# Altium PCB Copy of WoodStoveLayout2.PcbDoc (part 3 of 4)
Units mil, origin at the board's own origin, x right, y up, seen from the top; angles counter-clockwise.
Board outline 4000 x 3000 mil, 4 copper layers (Top Layer, L2, L3, Bottom Layer), stack 64.6 mil thick; 132 components, 92 nets, 551 pads, 53 vias.
Unrouted connection lines stored in the file: 211.
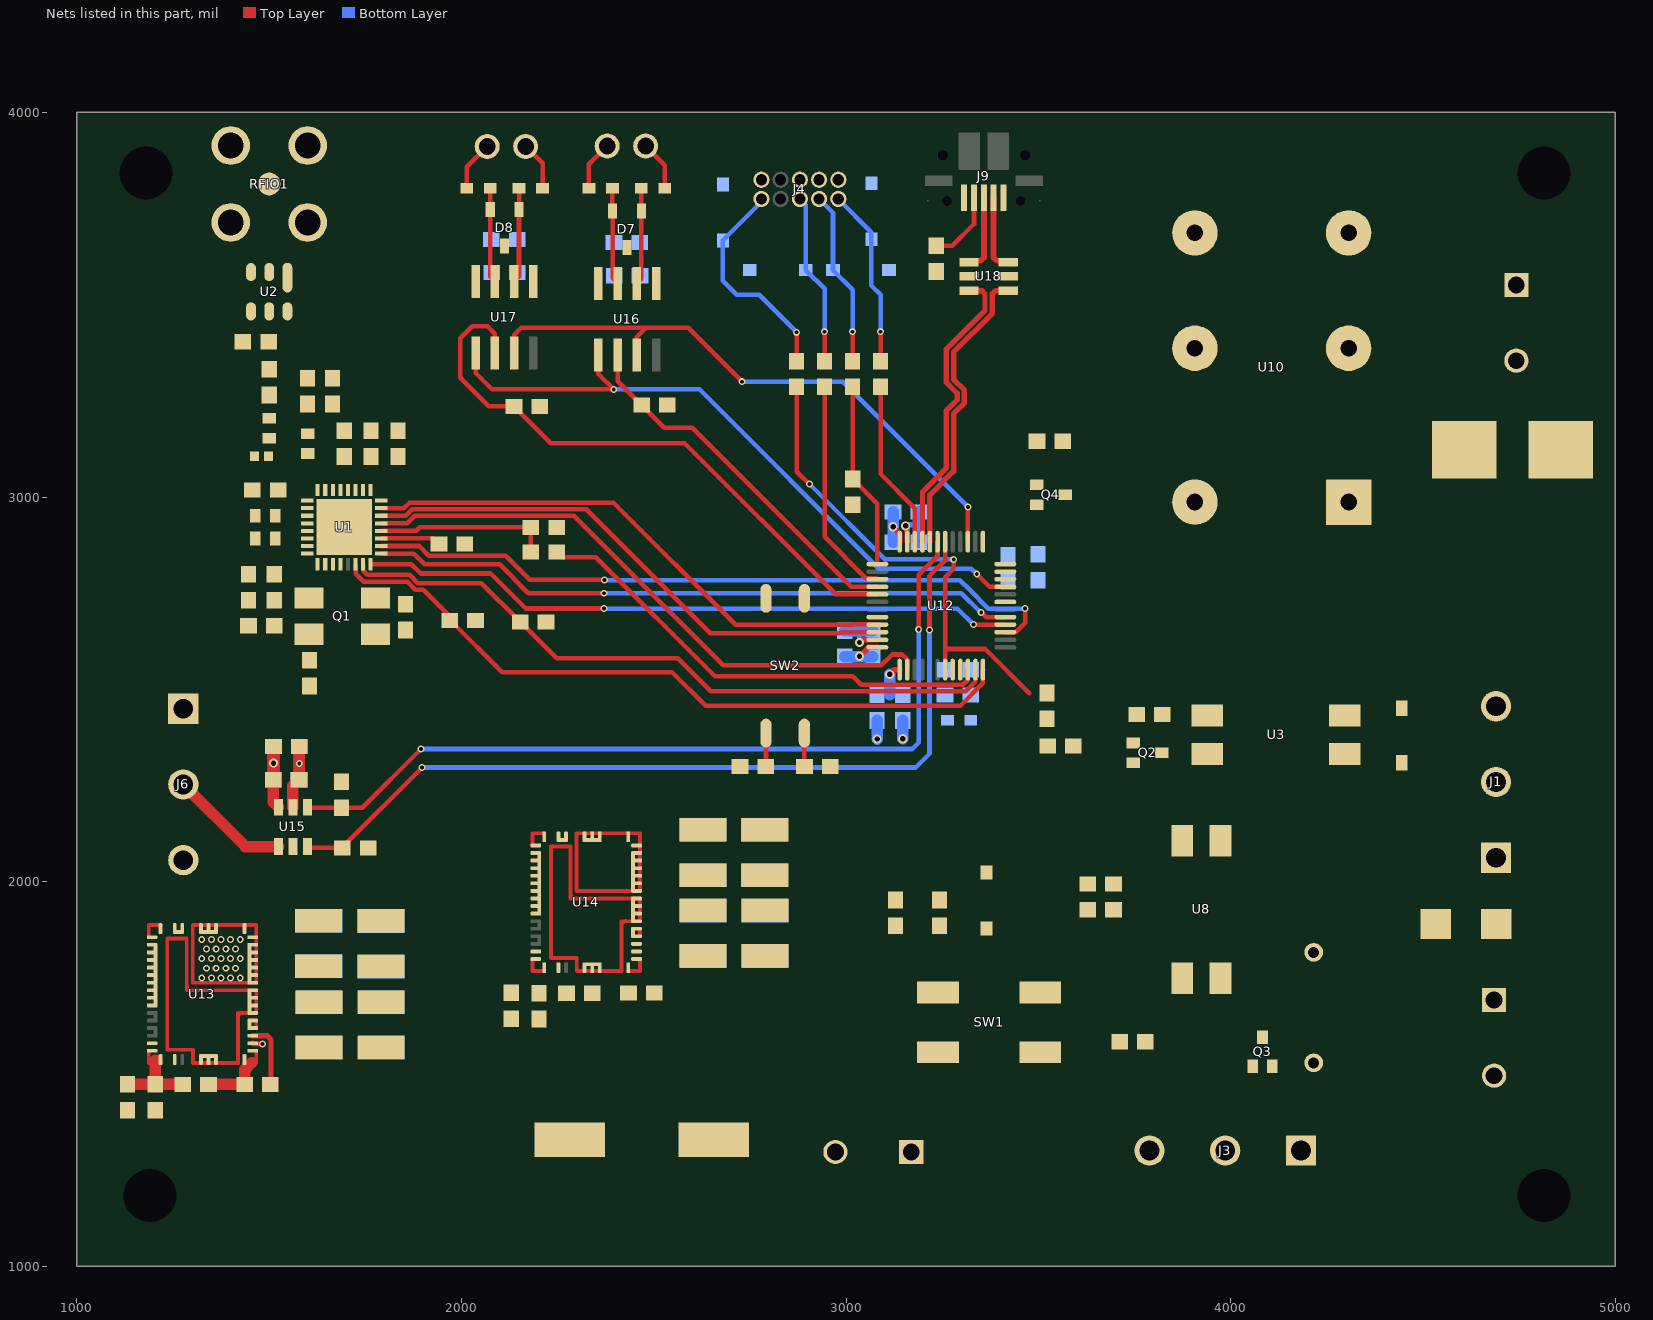
[diagram p4: the nets of this part, all layers, seen from the top]

## Part data (continued)
FB1: Case/Package=0603, Case Code (Metric)=1608, Current Rating=500mA, DC Resistance (DCR)=380mR, Frequency=100MHz, Manufacturer=Murata, Manufacturer Part Number=BLM18AG601SN1D, Max Operating Temperature=125°C, Min Operating Temperature=-55°C, Package Quantity=1, Supplier Part Number 1=490-1014-2-ND, Tolerance=25%, Case Code (Imperial)=0603, ComponentLink1Description=https://datasheet.ciiva.com/1012/l0110s0100blm18a-1012017.pdf, ComponentLink1URL=https://datasheet.ciiva.com/1012/l0110s0100blm18a-1012017.pdf, ComponentLink2Description=https://datasheet.ciiva.com/1012/l0110s0100blm18a-1012018.pdf, ComponentLink2URL=https://datasheet.ciiva.com/1012/l0110s0100blm18a-1012018.pdf, ComponentLink3Description=https://datasheet.ciiva.com/1012/l0110s0100blm18a-1012019.pdf, ComponentLink3URL=https://datasheet.ciiva.com/1012/l0110s0100blm18a-1012019.pdf, ComponentLink4Description=https://datasheet.ciiva.com/1466/1756147-1466933.pdf, ComponentLink4URL=https://datasheet.ciiva.com/1466/1756147-1466933.pdf, ComponentLink5Description=https://datasheet.ciiva.com/19460/1844766-19460213.pdf, ComponentLink5URL=https://datasheet.ciiva.com/19460/1844766-19460213.pdf, ComponentLink6Description=https://datasheet.ciiva.com/1466/1756147-1466934.pdf, ComponentLink6URL=https://datasheet.ciiva.com/1466/1756147-1466934.pdf, ComponentLink7Description=https://datasheet.ciiva.com/16210/l0110s0100blm18a-16210006.pdf, ComponentLink7URL=https://datasheet.ciiva.com/16210/l0110s0100blm18a-16210006.pdf, ComponentLink8Description=https://datasheet.ciiva.com/3081/l0110s0100blm18a-3081613.pdf, ComponentLink8URL=https://datasheet.ciiva.com/3081/l0110s0100blm18a-3081613.pdf, ComponentLink9Description=https://datasheet.ciiva.com/29347/442309-da-01-en-chip-drossel-0603-600r-500ma-1-6x0-8mm-29347900.pdf, ComponentLink9URL=https://datasheet.ciiva.com/29347/442309-da-01-en-chip-drossel-0603-600r-500ma-1-6x0-8mm-29347900.pdf, ComponentLink10Description=https://datasheet.ciiva.com/41449/001172228-da-01-en-drossel-0603-600r-1-6x0-8mm-4000st-41449517.pdf, ComponentLink10URL=https://datasheet.ciiva.com/41449/001172228-da-01-en-drossel-0603-600r-1-6x0-8mm-4000st-41449517.pdf, Core Material=Ferrite, DC Current=500mA, Depth=0.8mm, Height=0.8mm, Impedance=600R, Lead Free="Lead Free", Length=1.6mm, Material=Steel,Ferrite, Max Current Rating=500mA, Max DC Current=500mA, Military Standard=Not, Number of Circuits=1, Number of Lines=1, Number of Pins=2, Packaging="Tape and Reel", Pricing 1="4000=0.02096, 8000=0.019, 12000=0.01834, 28000=0.01703, 100000=0.01683 (USD)", Radiation Hardening=No, REACH SVHC="No SVHC", Shielding=Unshielded, Stock 1=432000, Supplier 1=Digi-Key, Termination=SMD/SMT, Test Frequency=100MHz, Weight=7.1E-05oz, Width=0.8mm
FB2 FB3 FB4 FB5: Case/Package=0603, Case Code (Metric)=1608, Current Rating=1A, DC Resistance (DCR)=200mR, Manufacturer=Murata, Manufacturer Part Number=BLM18PG471SN1D, Max Operating Temperature=125°C, Min Operating Temperature=-55°C, Package Quantity=1, Supplier Part Number 1=490-5223-2-ND, Test Frequency=100MHz, Tolerance=25%, Case Code (Imperial)=0603, ComponentLink1Description=https://datasheet.ciiva.com/11800/0900766b81275ca5-11800885.pdf, ComponentLink1URL=https://datasheet.ciiva.com/11800/0900766b81275ca5-11800885.pdf, ComponentLink2Description=https://datasheet.ciiva.com/16331/l0110s0100blm18p-16331542.pdf, ComponentLink2URL=https://datasheet.ciiva.com/16331/l0110s0100blm18p-16331542.pdf, ComponentLink3Description=https://datasheet.ciiva.com/8021/1740433-8021497.pdf, ComponentLink3URL=https://datasheet.ciiva.com/8021/1740433-8021497.pdf, ComponentLink4Description=https://datasheet.ciiva.com/6212/l0110s0100blm18p-6212506.pdf, ComponentLink4URL=https://datasheet.ciiva.com/6212/l0110s0100blm18p-6212506.pdf, ComponentLink5Description=https://datasheet.ciiva.com/8021/1740433-8021498.pdf, ComponentLink5URL=https://datasheet.ciiva.com/8021/1740433-8021498.pdf, ComponentLink6Description=https://datasheet.ciiva.com/6212/l0110s0100blm18p-6212508.pdf, ComponentLink6URL=https://datasheet.ciiva.com/6212/l0110s0100blm18p-6212508.pdf, ComponentLink7Description=https://datasheet.ciiva.com/14122/blm-series-eng-tds-14122876.pdf, ComponentLink7URL=https://datasheet.ciiva.com/14122/blm-series-eng-tds-14122876.pdf, ComponentLink8Description=https://datasheet.ciiva.com/6212/l0110s0100blm18p-6212509.pdf, ComponentLink8URL=https://datasheet.ciiva.com/6212/l0110s0100blm18p-6212509.pdf, ComponentLink9Description=https://datasheet.ciiva.com/8508/l0110s0100blm18p-8508303.pdf, ComponentLink9URL=https://datasheet.ciiva.com/8508/l0110s0100blm18p-8508303.pdf, Core Material=Ferrite, DC Current=1A, Depth=0.8mm, Height=0.8mm, Impedance=470R, Lead Free="Lead Free", Length=1.6mm, Material=Steel,Ferrite, Max Current Rating=1A, Max DC Current=1A, Military Standard=Not, Number of Circuits=1, Number of Lines=1, Number of Pins=2, Packaging="Tape and Reel", Pricing 1="4000=0.02208, 8000=0.02001, 12000=0.01932, 28000=0.01794, 100000=0.01773 (USD)", Radiation Hardening=No, REACH SVHC="No SVHC", Resistance=200mR, Stock 1=328000, Supplier 1=Digi-Key, Termination=SMD/SMT, Width=0.8mm
J1 J3 J6: "3 Position terminal block"
J2 J5 J10: "Female Header, Pitch 5 mm, 1 x 2 Position, Height 10 mm, Tail Length 3.5 mm, Rohs, Bulk", Color=Green, Current=13.5A, Standard Package=300, Supplier Part Number 1=23C9697, Voltage=300V, 3D Model=282836-2.pdf, Category="Connectors, Interconnects", Clamp Material - Plating="Brass - Nickel Plated", ComponentLink1Description="Manufacturer URL", ComponentLink1URL=http://www.te.com, ComponentLink2Description=Datasheet, ComponentLink2URL=http://www.te.com.cn/commerce/DocumentDelivery/DDEController?Action=showdoc&DocId=Catalog+Section%7F1308389_EUROSTYLE_TERMINAL_BLOCKS%7F0607%7Fpdf%7FEnglish%7FENG_CS_1308389_EUROSTYLE_TERMINAL_BLOCKS_0607.pdf%7F282836-2, Contact Material - Plating="Brass - Tin Plated", Dynamic Catalog="Buchanan Series", Family="Terminal Blocks - Wire to Board", Featured Product="Eurostyle Terminal Block Connectors", Features="Interlocking (Side)", Housing Material="Polyamide (PA66), Nylon 6/6", Mating Orientation="Horizontal with Board", Mounting Type="Through Hole", Number of Levels=1, Other Names="5ULV-02B / A98076", PackageDescription="Female Header, Pitch 5 mm, 1 x 2 Position, Height 10 mm, Tail Length 3.5 mm", PackageReference=THD, Packaging=Bulk, Pitch="0.197\" (5.00mm)", Positions Per Level=2, Product Training Modules="Wire-to-Board Eurostyle Terminal Blocks", RoHS Information="282836-2 Statement of Compliance", Screw Material - Plating="Brass - Nickel Plated", Screw Thread=M3, Series=Buchanan, Supplier 1=Newark, Supplier 2=Farnell, Supplier 3=Digi-Key, Supplier Part Number 2=3089034, Supplier Part Number 3=A98076-ND, Torque - Screw="0.68 Nm (6 Lb-In)", Wire Gauge="16-30 AWG", Wire Termination="Screw - Rising Cage Clamp"
J4: Housing Colour=Black, Manufacturer=Samtec, Manufacturer Part Number=SHF-105-01-L-D-TH, Max Operating Temperature=125°C, Min Operating Temperature=-55°C, Supplier Part Number 1=SHF-105-01-L-D-TH-ND, ComponentLink1Description=https://datasheet.ciiva.com/9475/eshf-9475367.pdf, ComponentLink1URL=https://datasheet.ciiva.com/9475/eshf-9475367.pdf, ComponentLink2Description=https://datasheet.ciiva.com/22665/shf-22665879.pdf, ComponentLink2URL=https://datasheet.ciiva.com/22665/shf-22665879.pdf, ComponentLink3Description=https://datasheet.ciiva.com/6091/shf-6091993.pdf, ComponentLink3URL=https://datasheet.ciiva.com/6091/shf-6091993.pdf, ComponentLink4Description=https://datasheet.ciiva.com/16710/eshf-16710363.pdf, ComponentLink4URL=https://datasheet.ciiva.com/16710/eshf-16710363.pdf, ComponentLink5Description=https://datasheet.ciiva.com/23730/shf-1xx-01-x-d-xx-xx-mkt-23730878.pdf, ComponentLink5URL=https://datasheet.ciiva.com/23730/shf-1xx-01-x-d-xx-xx-mkt-23730878.pdf, Contact Material=Bronze, Contact Plating=Nickel,Gold, Depth=5.59mm, Gender=Male, Housing Material=Polymer, Length=12.7mm, Number of Contacts=10, Number of Rows=2, Orientation=Straight, Packaging=Bulk, Pitch=1.27mm, Radiation Hardening=No, REACH SVHC="No SVHC", Stock 1=0, Supplier 1=Digi-Key, Termination=Solder
J7 J8: "2.54mm Terminal Connector"
J9: library part 10103594-0001LF
L1: Case/Package=0402, Case Code (Metric)=1005, Current Rating=120mA, DC Resistance (DCR)=2.52R, Inductance=100nh, Inductance Tolerance=5%, Manufacturer=Murata, Manufacturer Part Number=LQW15ANR10J00D, Max Operating Temperature=125°C, Min Operating Temperature=-55°C, Package Quantity=10000, Self Resonant Frequency=1.5GHz, Supplier Part Number 1=490-4090-2-ND, Test Frequency=100MHz, Case Code (Imperial)=0402, ComponentLink1Description=https://datasheet.ciiva.com/18088/getdatasheetpartid-55782-18088805.pdf, ComponentLink1URL=https://datasheet.ciiva.com/18088/getdatasheetpartid-55782-18088805.pdf, ComponentLink2Description=https://datasheet.ciiva.com/17247/l0075s0080lqw15a-00-17247734.pdf, ComponentLink2URL=https://datasheet.ciiva.com/17247/l0075s0080lqw15a-00-17247734.pdf, ComponentLink3Description=https://datasheet.ciiva.com/16293/l0075s0080lqw15a-00-16293049.pdf, ComponentLink3URL=https://datasheet.ciiva.com/16293/l0075s0080lqw15a-00-16293049.pdf, ComponentLink4Description=https://datasheet.ciiva.com/4977/product-4977354.pdf, ComponentLink4URL=https://datasheet.ciiva.com/4977/product-4977354.pdf, ComponentLink5Description=https://datasheet.ciiva.com/1042/l0075s0080lqw15a-00-1042204.pdf, ComponentLink5URL=https://datasheet.ciiva.com/1042/l0075s0080lqw15a-00-1042204.pdf, ComponentLink6Description=https://datasheet.ciiva.com/1042/l0075s0080lqw15a-00-1042205.pdf, ComponentLink6URL=https://datasheet.ciiva.com/1042/l0075s0080lqw15a-00-1042205.pdf, ComponentLink7Description=https://datasheet.ciiva.com/8507/l0075s0080lqw15a-00-8507421.pdf, ComponentLink7URL=https://datasheet.ciiva.com/8507/l0075s0080lqw15a-00-8507421.pdf, ComponentLink8Description=https://datasheet.ciiva.com/1042/l0075s0080lqw15a-00-1042206.pdf, ComponentLink8URL=https://datasheet.ciiva.com/1042/l0075s0080lqw15a-00-1042206.pdf, ComponentLink9Description=https://datasheet.ciiva.com/11799/0900766b8090d800-11799038.pdf, ComponentLink9URL=https://datasheet.ciiva.com/11799/0900766b8090d800-11799038.pdf, Core Material=Ferrite,Air, DC Current=120mA, Depth=0.6mm, Height=0.5mm, Lead Free="Lead Free", Length=1mm, Max DC Current=120mA, Military Standard=Not, Mount="Surface Mount", Number of Pins=2, Packaging="Tape and Reel", Pricing 1="10000=0.048, 30000=0.0465, 50000=0.045, 100000=0.0435 (USD)", Radiation Hardening=No, REACH SVHC="No SVHC", Shielding=Unshielded, Stock 1=160000, Supplier 1=Digi-Key, Termination=SMD/SMT, Tolerance=5%, Weight=2.8E-05oz, Width=0.5mm
L2: Case/Package=0402, Case Code (Metric)=1005, Current Rating=300mA, DC Resistance (DCR)=240mR, Inductance=8.2nh, Manufacturer=Murata, Manufacturer Part Number=LQG15HS8N2J02D, Max Operating Temperature=125°C, Min Operating Temperature=-55°C, Package Quantity=10000, Self Resonant Frequency=3.7GHz, Test Frequency=100MHz, Tolerance=5%, Case Code (Imperial)=0402, ComponentLink1Description=https://datasheet.ciiva.com/1038/l0075s0083lqg15hs-1038112.pdf, ComponentLink1URL=https://datasheet.ciiva.com/1038/l0075s0083lqg15hs-1038112.pdf, ComponentLink2Description=https://datasheet.ciiva.com/1038/l0075s0083lqg15hs-1038113.pdf, ComponentLink2URL=https://datasheet.ciiva.com/1038/l0075s0083lqg15hs-1038113.pdf, ComponentLink3Description=https://datasheet.ciiva.com/1038/l0075s0083lqg15hs-1038114.pdf, ComponentLink3URL=https://datasheet.ciiva.com/1038/l0075s0083lqg15hs-1038114.pdf, ComponentLink4Description=https://datasheet.ciiva.com/16208/l0075s0083lqg15hs-16208342.pdf, ComponentLink4URL=https://datasheet.ciiva.com/16208/l0075s0083lqg15hs-16208342.pdf, ComponentLink5Description=https://datasheet.ciiva.com/11799/0900766b8090d685-11799047.pdf, ComponentLink5URL=https://datasheet.ciiva.com/11799/0900766b8090d685-11799047.pdf, ComponentLink6Description=https://datasheet.ciiva.com/17247/l0075s0083lqg15hs-17247128.pdf, ComponentLink6URL=https://datasheet.ciiva.com/17247/l0075s0083lqg15hs-17247128.pdf, ComponentLink7Description=https://datasheet.ciiva.com/8510/l0075s0083lqg15hs-8510877.pdf, ComponentLink7URL=https://datasheet.ciiva.com/8510/l0075s0083lqg15hs-8510877.pdf, Core Material=Air, DC Current=300mA, Depth=0.55mm, Height=0.5mm, Height - Seated (Max)=0.022inch, Lead Free="Lead Free", Length=1mm, Max DC Current=300mA, Military Standard=Not, Mount="Surface Mount", Packaging="Tape and Reel", Pricing 1="2000=0.0218 (USD)", Q Factor=8, Radiation Hardening=No, Shielding=Unshielded, Stock 1=0, Supplier 1="Future Electronics", Supplier Part Number 1=LQG15HS8N2J02D, Termination=SMD/SMT, Weight=2.3E-05oz, Width=0.02inch
L3 L4: Case/Package=0402, Case Code (Metric)=1005, Current Rating=540mA, DC Resistance (DCR)=140mR, Inductance=8.2nh, Inductance Tolerance=2%, Manufacturer=Murata, Manufacturer Part Number=LQW15AN8N2G00D, Max Operating Temperature=125°C, Min Operating Temperature=-55°C, Package Quantity=10000, Self Resonant Frequency=5.5GHz, Supplier Part Number 1=490-6849-2-ND, Test Frequency=100MHz, Case Code (Imperial)=0402, ComponentLink1Description=https://datasheet.ciiva.com/17278/l0075s0080lqw15a-00-17278341.pdf, ComponentLink1URL=https://datasheet.ciiva.com/17278/l0075s0080lqw15a-00-17278341.pdf, ComponentLink2Description=https://datasheet.ciiva.com/11799/0900766b8090d800-11799384.pdf, ComponentLink2URL=https://datasheet.ciiva.com/11799/0900766b8090d800-11799384.pdf, ComponentLink3Description=https://datasheet.ciiva.com/16455/l0075s0080lqw15a-00-16455832.pdf, ComponentLink3URL=https://datasheet.ciiva.com/16455/l0075s0080lqw15a-00-16455832.pdf, Core Material=Ferrite,Air, DC Current=540mA, Depth=0.7mm, Height=0.5mm, Lead Free="Lead Free", Length=1mm, Max DC Current=540mA, Military Standard=Not, Mount="Surface Mount", Number of Pins=2, Packaging="Tape and Reel", Pricing 1="10000=0.0528, 30000=0.05115, 50000=0.0495, 100000=0.04785 (USD)", Q Factor=25, Radiation Hardening=No, REACH SVHC="No SVHC", Shielding=Unshielded, Stock 1=60000, Supplier 1=Digi-Key, Termination=SMD/SMT, Tolerance=2%, Weight=2.8E-05oz, Width=0.02inch
Q1: "CRYSTAL 12.8000MHZ 10PF SMD", Part No=ABM3B-12.800MHZ-10-1-U-T
Q2 Q3 Q4: "Small Signal MOSFET, 30 V, 270 mA, N-Channel, 3-Pin SC70, Pb-Free, Tape and Reel", Manufacturer="On Semiconductor", Package Type=SC-70-3, Supplier Part Number 1=60W1862, Channel Polarity="N Channel", Ciss Typ (pF)=20, ComponentLink1Description="Manufacturer URL", ComponentLink1URL=http://www.onsemi.com/, ComponentLink2Description=Datasheet, ComponentLink2URL=http://www.onsemi.cn/pub_link/Collateral/NTS4001N-D.PDF, ComponentLink3Description="Package Specification", ComponentLink3URL=http://www.onsemi.cn/pub_link/Collateral/419-04.PDF, Configuration=Single, Coss Typ (pF)=19, Crss Typ (pF)=7.25, DatasheetVersion="Rev. 5", ID Max (A)=0.27, Mounting Technology="Surface Mount", PackageDescription="3-Pin Small Outline Transistor, Body 2 x 1.25 mm, Pitch 0.65 mm", PackageReference=SC-70-3-419-04, PackageVersion="Rev. N, 11/2008", Packing="Tape and Reel", PartNumber=NVS4001NT1G, PD Max (W)=0.33, RoHS=Pb-Free, Supplier 1=Newark, Supplier 2=Mouser, Supplier Part Number 2=863-NVS4001NT1G, V(BR)DSS Min (V)=30, VGS(th) Max (V)=1.5, VGS Max (V)=20
R1: Case/Package=0603, Case Code (Metric)=1608, Manufacturer=Vishay, Manufacturer Part Number=CRCW0603100KFKEA, Max Operating Temperature=155°C, Max Power Dissipation=100mW, Min Operating Temperature=-55°C, Package Quantity=10, Resistance=100k, Temperature Coefficient=100ppm/°C, Tolerance=1%, Voltage Rating=75V, Case Code (Imperial)=0603, ComponentLink1Description=https://datasheet.ciiva.com/2465/dcrcwe3-2465525.pdf, ComponentLink1URL=https://datasheet.ciiva.com/2465/dcrcwe3-2465525.pdf, ComponentLink2Description=https://datasheet.ciiva.com/7777/1697337-7777269.pdf, ComponentLink2URL=https://datasheet.ciiva.com/7777/1697337-7777269.pdf, ComponentLink3Description=https://datasheet.ciiva.com/15159/getdatasheetpartid-93113-15159925.pdf, ComponentLink3URL=https://datasheet.ciiva.com/15159/getdatasheetpartid-93113-15159925.pdf, ComponentLink4Description=https://datasheet.ciiva.com/46441/1720486-46441605.pdf, ComponentLink4URL=https://datasheet.ciiva.com/46441/1720486-46441605.pdf, ComponentLink5Description=https://datasheet.ciiva.com/2465/dcrcwe3-2465526.pdf, ComponentLink5URL=https://datasheet.ciiva.com/2465/dcrcwe3-2465526.pdf, ComponentLink6Description=https://datasheet.ciiva.com/2465/dcrcwe3-2465527.pdf, ComponentLink6URL=https://datasheet.ciiva.com/2465/dcrcwe3-2465527.pdf, ComponentLink7Description=https://datasheet.ciiva.com/8340/dcrcwe3-8340199.pdf, ComponentLink7URL=https://datasheet.ciiva.com/8340/dcrcwe3-8340199.pdf, ComponentLink8Description=https://datasheet.ciiva.com/16725/70201119-16725223.pdf, ComponentLink8URL=https://datasheet.ciiva.com/16725/70201119-16725223.pdf, ComponentLink9Description=https://datasheet.ciiva.com/8340/dcrcwe3-8340201.pdf, ComponentLink9URL=https://datasheet.ciiva.com/8340/dcrcwe3-8340201.pdf, ComponentLink10Description=https://datasheet.ciiva.com/7791/66915-7791994.pdf, ComponentLink10URL=https://datasheet.ciiva.com/7791/66915-7791994.pdf, ComponentLink11Description=https://datasheet.ciiva.com/5545/dcrcwe3-109170-5545100.pdf, ComponentLink11URL=https://datasheet.ciiva.com/5545/dcrcwe3-109170-5545100.pdf, ComponentLink12Description=https://datasheet.ciiva.com/11809/0900766b80d98afc-11809004.pdf, ComponentLink12URL=https://datasheet.ciiva.com/11809/0900766b80d98afc-11809004.pdf, ComponentLink13Description=https://datasheet.ciiva.com/26317/fld-crcw-e3-data-en-26317165.pdf, ComponentLink13URL=https://datasheet.ciiva.com/26317/fld-crcw-e3-data-en-26317165.pdf, ComponentLink14Description=https://datasheet.ciiva.com/16941/dcrcw-16941311.pdf, ComponentLink14URL=https://datasheet.ciiva.com/16941/dcrcw-16941311.pdf, Composition="Thick Film", Contact Plating=Tin,Lead, Depth=0.85mm, Height=0.45mm, Lead Free="Lead Free", Length=1.55mm, Military Standard=Not, Number of Pins=2, Number of Terminations=2, Packaging="Tape and Reel", Power Rating=100mW, Radiation Hardening=No, REACH SVHC=Unknown, Stock 1=0, Supplier 1="Future Electronics", Supplier Part Number 1=CRCW0603100KFKEA, Termination=SMD/SMT, Voltage Rating (DC)=75V, Weight=7.1E-05oz, Width=0.033inch
R2 R3 R10 R23: Resistance=NC
R4 R5 R17 R27 R28 R31 R34 R35 R36 R37 R38: Case/Package=0603, Case Code (Metric)=1608, Manufacturer=Panasonic, Manufacturer Part Number=ERJ-3EKF1002V, Max Operating Temperature=155°C, Max Power Dissipation=100mW, Min Operating Temperature=-55°C, Package Quantity=1, Resistance=10k, Supplier Part Number 1=P10.0KHTR-ND, Temperature Coefficient=100ppm/°C, Tolerance=1%, Voltage Rating=75V, Case Code (Imperial)=0603, ComponentLink1Description=https://datasheet.ciiva.com/16511/aoa0000ce2-16511861.pdf, ComponentLink1URL=https://datasheet.ciiva.com/16511/aoa0000ce2-16511861.pdf, ComponentLink2Description=https://datasheet.ciiva.com/46372/1678782-46372725.pdf, ComponentLink2URL=https://datasheet.ciiva.com/46372/1678782-46372725.pdf, ComponentLink3Description=https://datasheet.ciiva.com/28514/426256-28514198.pdf, ComponentLink3URL=https://datasheet.ciiva.com/28514/426256-28514198.pdf, ComponentLink4Description=https://datasheet.ciiva.com/9194/aoa0000ce2-9194199.pdf, ComponentLink4URL=https://datasheet.ciiva.com/9194/aoa0000ce2-9194199.pdf, ComponentLink5Description=https://datasheet.ciiva.com/7830/aoa0000ce2-7830729.pdf, ComponentLink5URL=https://datasheet.ciiva.com/7830/aoa0000ce2-7830729.pdf, ComponentLink6Description=https://datasheet.ciiva.com/17212/aoa0000ce2-17212105.pdf, ComponentLink6URL=https://datasheet.ciiva.com/17212/aoa0000ce2-17212105.pdf, ComponentLink7Description=https://datasheet.ciiva.com/30208/aoa0000ce2-30208985.pdf, ComponentLink7URL=https://datasheet.ciiva.com/30208/aoa0000ce2-30208985.pdf, ComponentLink8Description=https://datasheet.ciiva.com/48530/aoa0000ce2-48530988.pdf, ComponentLink8URL=https://datasheet.ciiva.com/48530/aoa0000ce2-48530988.pdf, ComponentLink9Description=https://datasheet.ciiva.com/24070/aoa0000ce2-24070318.pdf, ComponentLink9URL=https://datasheet.ciiva.com/24070/aoa0000ce2-24070318.pdf, ComponentLink10Description=https://datasheet.ciiva.com/16759/70260748-16759807.pdf, ComponentLink10URL=https://datasheet.ciiva.com/16759/70260748-16759807.pdf, Composition="Thick Film", Contact Plating=Tin, Depth=0.8mm, Height=0.45mm, Lead Free="Lead Free", Length=1.6mm, Military Standard=Not, Mount="Surface Mount", Number of Pins=2, Number of Terminations=2, Packaging="Tape and Reel", Power Rating=100mW, Pricing 1="5000=0.00751, 10000=0.00653, 25000=0.00573, 50000=0.00526, 125000=0.00515 (USD)", Radiation Hardening=No, REACH SVHC="No SVHC", Stock 1=0, Supplier 1=Digi-Key, Termination=SMD/SMT, Voltage Rating (DC)=75V, Width=0.031inch
R6: Case/Package=0603, Case Code (Metric)=1608, Manufacturer=Vishay, Manufacturer Part Number=CRCW06036K80FKEA, Max Operating Temperature=155°C, Max Power Dissipation=100mW, Min Operating Temperature=-55°C, Package Quantity=10, Resistance=6.8k, Supplier Part Number 1=541-6.80KHTR-ND, Temperature Coefficient=100ppm/°C, Tolerance=1%, Voltage Rating=75V, Case Code (Imperial)=0603, ComponentLink1Description=https://datasheet.ciiva.com/11811/0900766b80d98afc-11811920.pdf, ComponentLink1URL=https://datasheet.ciiva.com/11811/0900766b80d98afc-11811920.pdf, ComponentLink2Description=https://datasheet.ciiva.com/2465/dcrcwe3-2465684.pdf, ComponentLink2URL=https://datasheet.ciiva.com/2465/dcrcwe3-2465684.pdf, ComponentLink3Description=https://datasheet.ciiva.com/2465/dcrcwe3-2465685.pdf, ComponentLink3URL=https://datasheet.ciiva.com/2465/dcrcwe3-2465685.pdf, ComponentLink4Description=https://datasheet.ciiva.com/2465/dcrcwe3-2465686.pdf, ComponentLink4URL=https://datasheet.ciiva.com/2465/dcrcwe3-2465686.pdf, ComponentLink5Description=https://datasheet.ciiva.com/26314/fld-crcw-e3-data-en-26314745.pdf, ComponentLink5URL=https://datasheet.ciiva.com/26314/fld-crcw-e3-data-en-26314745.pdf, ComponentLink6Description=https://datasheet.ciiva.com/16771/70201119-16771274.pdf, ComponentLink6URL=https://datasheet.ciiva.com/16771/70201119-16771274.pdf, ComponentLink7Description=https://datasheet.ciiva.com/22870/70201119-22870027.pdf, ComponentLink7URL=https://datasheet.ciiva.com/22870/70201119-22870027.pdf, ComponentLink8Description=https://datasheet.ciiva.com/3257/dcrcwe3-3257852.pdf, ComponentLink8URL=https://datasheet.ciiva.com/3257/dcrcwe3-3257852.pdf, ComponentLink9Description=https://datasheet.ciiva.com/7673/1697337-7673148.pdf, ComponentLink9URL=https://datasheet.ciiva.com/7673/1697337-7673148.pdf, ComponentLink10Description=https://datasheet.ciiva.com/3257/dcrcwe3-3257853.pdf, ComponentLink10URL=https://datasheet.ciiva.com/3257/dcrcwe3-3257853.pdf, ComponentLink11Description=https://datasheet.ciiva.com/16508/dcrcwe3-16508431.pdf, ComponentLink11URL=https://datasheet.ciiva.com/16508/dcrcwe3-16508431.pdf, Composition="Thick Film", Contact Plating=Tin, Depth=0.85mm, Height=0.45mm, Lead Free="Lead Free", Length=1.55mm, Military Standard=Not, Number of Terminations=2, Packaging="Tape and Reel", Power Rating=100mW, Pricing 1="5000=0.00497, 10000=0.00432, 25000=0.00405 (USD)", Radiation Hardening=No, REACH SVHC=Unknown, Stock 1=0, Supplier 1=Digi-Key, Termination=SMD/SMT, Voltage Rating (DC)=75V, Weight=7.1E-05oz, Width=0.033inch
R7: Case/Package=0603, Case Code (Metric)=1608, Manufacturer="Vishay Dale", Manufacturer Part Number=CRCW06031R00FKEA, Max Operating Temperature=155°C, Max Power Dissipation=100mW, Min Operating Temperature=-55°C, Package Quantity=10, Resistance=1, Supplier Part Number 1=541-1.00HHTR-ND, Temperature Coefficient=100ppm/°C, Tolerance=1%, Voltage Rating=75V, Case Code (Imperial)=0603, ComponentLink1Description=https://datasheet.ciiva.com/16396/aoa0000ce3-16396837.pdf, ComponentLink1URL=https://datasheet.ciiva.com/16396/aoa0000ce3-16396837.pdf, ComponentLink2Description=https://datasheet.ciiva.com/28691/391509-28691973.pdf, ComponentLink2URL=https://datasheet.ciiva.com/28691/391509-28691973.pdf, ComponentLink3Description=https://datasheet.ciiva.com/16784/70068852-16784839.pdf, ComponentLink3URL=https://datasheet.ciiva.com/16784/70068852-16784839.pdf, ComponentLink4Description=https://datasheet.ciiva.com/9117/aoa0000ce3-9117368.pdf, ComponentLink4URL=https://datasheet.ciiva.com/9117/aoa0000ce3-9117368.pdf, ComponentLink5Description=https://datasheet.ciiva.com/11810/0900766b80eefa12-11810728.pdf, ComponentLink5URL=https://datasheet.ciiva.com/11810/0900766b80eefa12-11810728.pdf, ComponentLink6Description=https://datasheet.ciiva.com/24165/aoa0000ce3-72189-24165336.pdf, ComponentLink6URL=https://datasheet.ciiva.com/24165/aoa0000ce3-72189-24165336.pdf, ComponentLink7Description=https://datasheet.ciiva.com/30060/6aoa0000ce3-30060648.pdf, ComponentLink7URL=https://datasheet.ciiva.com/30060/6aoa0000ce3-30060648.pdf, ComponentLink8Description=https://datasheet.ciiva.com/6138/391509-6138777.pdf, ComponentLink8URL=https://datasheet.ciiva.com/6138/391509-6138777.pdf, ComponentLink9Description=https://datasheet.ciiva.com/16766/70068852-16766778.pdf, ComponentLink9URL=https://datasheet.ciiva.com/16766/70068852-16766778.pdf, ComponentLink10Description=https://datasheet.ciiva.com/16853/aoa0000ce3-16853436.pdf, ComponentLink10URL=https://datasheet.ciiva.com/16853/aoa0000ce3-16853436.pdf, ComponentLink11Description=https://datasheet.ciiva.com/43455/391509-43455868.pdf, ComponentLink11URL=https://datasheet.ciiva.com/43455/391509-43455868.pdf, ComponentLink12Description=https://datasheet.ciiva.com/28547/391509-28547230.pdf, ComponentLink12URL=https://datasheet.ciiva.com/28547/391509-28547230.pdf, ComponentLink13Description=https://datasheet.ciiva.com/7792/1359337-7792119.pdf, ComponentLink13URL=https://datasheet.ciiva.com/7792/1359337-7792119.pdf, ComponentLink14Description=https://datasheet.ciiva.com/2465/dcrcwe3-2465528.pdf, ComponentLink14URL=https://datasheet.ciiva.com/2465/dcrcwe3-2465528.pdf, ComponentLink15Description=https://datasheet.ciiva.com/2465/dcrcwe3-2465529.pdf, ComponentLink15URL=https://datasheet.ciiva.com/2465/dcrcwe3-2465529.pdf, ComponentLink16Description=https://datasheet.ciiva.com/3257/dcrcwe3-3257225.pdf, ComponentLink16URL=https://datasheet.ciiva.com/3257/dcrcwe3-3257225.pdf, ComponentLink17Description=https://datasheet.ciiva.com/2465/dcrcwe3-2465530.pdf, ComponentLink17URL=https://datasheet.ciiva.com/2465/dcrcwe3-2465530.pdf, ComponentLink18Description=https://datasheet.ciiva.com/3257/dcrcwe3-3257226.pdf, ComponentLink18URL=https://datasheet.ciiva.com/3257/dcrcwe3-3257226.pdf, ComponentLink19Description=https://datasheet.ciiva.com/16883/dcrcwe3-16883290.pdf, ComponentLink19URL=https://datasheet.ciiva.com/16883/dcrcwe3-16883290.pdf, ComponentLink20Description=https://datasheet.ciiva.com/16768/70201119-16768957.pdf, ComponentLink20URL=https://datasheet.ciiva.com/16768/70201119-16768957.pdf, ComponentLink21Description=https://datasheet.ciiva.com/28621/1747939-28621389.pdf, ComponentLink21URL=https://datasheet.ciiva.com/28621/1747939-28621389.pdf, ComponentLink22Description=https://datasheet.ciiva.com/5541/dcrcwe3-109170-5541726.pdf, ComponentLink22URL=https://datasheet.ciiva.com/5541/dcrcwe3-109170-5541726.pdf, Composition="Thick Film", Contact Plating=Tin, Depth=0.85mm, Height=0.02inch, Lead Free="Lead Free", Length=1.55mm, Military Standard=Not, Mount="Surface Mount", Number of Pins=2, Number of Terminations=2, Packaging="Tape and Reel", Power Rating=100mW, Pricing 1="5000=0.00497, 10000=0.00432, 25000=0.00405 (USD)", Radiation Hardening=No, REACH SVHC=Unknown, Stock 1=0, Supplier 1=Digi-Key, Termination=SMD/SMT, Voltage Rating (DC)=75V, Weight=7.1E-05oz, Width=0.033inch
R8: Case/Package=0603, Case Code (Metric)=1608, Manufacturer=Vishay, Manufacturer Part Number=CRCW0603110RFKEA, Max Operating Temperature=155°C, Max Power Dissipation=100mW, Min Operating Temperature=-55°C, Package Quantity=10, Resistance=110, Supplier Part Number 1=541-110HTR-ND, Temperature Coefficient=100ppm/°C, Tolerance=1%, Voltage Rating=75V, Case Code (Imperial)=0603, ComponentLink1Description=https://datasheet.ciiva.com/11809/0900766b80d98afc-11809778.pdf, ComponentLink1URL=https://datasheet.ciiva.com/11809/0900766b80d98afc-11809778.pdf, ComponentLink2Description=https://datasheet.ciiva.com/2525/dcrcwe3-2525299.pdf, ComponentLink2URL=https://datasheet.ciiva.com/2525/dcrcwe3-2525299.pdf, ComponentLink3Description=https://datasheet.ciiva.com/2525/dcrcwe3-2525300.pdf, ComponentLink3URL=https://datasheet.ciiva.com/2525/dcrcwe3-2525300.pdf, ComponentLink4Description=https://datasheet.ciiva.com/2525/dcrcwe3-2525301.pdf, ComponentLink4URL=https://datasheet.ciiva.com/2525/dcrcwe3-2525301.pdf, ComponentLink5Description=https://datasheet.ciiva.com/7822/1697337-7822981.pdf, ComponentLink5URL=https://datasheet.ciiva.com/7822/1697337-7822981.pdf, ComponentLink6Description=https://datasheet.ciiva.com/16758/70201119-16758821.pdf, ComponentLink6URL=https://datasheet.ciiva.com/16758/70201119-16758821.pdf, ComponentLink7Description=https://datasheet.ciiva.com/3256/dcrcwe3-3256966.pdf, ComponentLink7URL=https://datasheet.ciiva.com/3256/dcrcwe3-3256966.pdf, ComponentLink8Description=https://datasheet.ciiva.com/7822/1697337-7822982.pdf, ComponentLink8URL=https://datasheet.ciiva.com/7822/1697337-7822982.pdf, ComponentLink9Description=https://datasheet.ciiva.com/3256/dcrcwe3-3256967.pdf, ComponentLink9URL=https://datasheet.ciiva.com/3256/dcrcwe3-3256967.pdf, ComponentLink10Description=https://datasheet.ciiva.com/26316/fld-crcw-e3-data-en-26316567.pdf, ComponentLink10URL=https://datasheet.ciiva.com/26316/fld-crcw-e3-data-en-26316567.pdf, ComponentLink11Description=https://datasheet.ciiva.com/16787/70201119-16787496.pdf, ComponentLink11URL=https://datasheet.ciiva.com/16787/70201119-16787496.pdf, ComponentLink12Description=https://datasheet.ciiva.com/7792/125364-7792010.pdf, ComponentLink12URL=https://datasheet.ciiva.com/7792/125364-7792010.pdf, ComponentLink13Description=https://datasheet.ciiva.com/16885/dcrcwe3-16885194.pdf, ComponentLink13URL=https://datasheet.ciiva.com/16885/dcrcwe3-16885194.pdf, ComponentLink14Description=https://datasheet.ciiva.com/22674/1912744-22674701.pdf, ComponentLink14URL=https://datasheet.ciiva.com/22674/1912744-22674701.pdf, ComponentLink15Description=https://datasheet.ciiva.com/22707/1697337-22707342.pdf, ComponentLink15URL=https://datasheet.ciiva.com/22707/1697337-22707342.pdf, Composition="Thick Film", Contact Plating=Tin, Depth=0.85mm, Height=0.45mm, Lead Free="Lead Free", Length=1.55mm, Military Standard=Not, Mount="Surface Mount", Number of Pins=2, Number of Terminations=2, Packaging="Tape and Reel", Power Rating=100mW, Pricing 1="5000=0.00497, 10000=0.00432, 25000=0.00405 (USD)", Radiation Hardening=No, REACH SVHC=Unknown, Stock 1=35000, Supplier 1=Digi-Key, Termination=SMD/SMT, Voltage Rating (DC)=75V, Weight=7.1E-05oz, Width=0.033inch
R9: Case/Package=Axial, Manufacturer="Stackpole Electronics", Manufacturer Part Number=CFM12JT560R, Max Operating Temperature=155°C, Max Power Dissipation=500mW, Min Operating Temperature=-55°C, Package Quantity=5000, Resistance=560, Supplier Part Number 1=S560HTR-ND, Temperature Coefficient=-400ppm/°C, Tolerance=5%, ComponentLink1Description=https://www.seielect.com/Catalog/SEI-CF_CFM.pdf, ComponentLink1URL=https://www.seielect.com/Catalog/SEI-CF_CFM.pdf, Composition="Carbon Film", Contact Plating=Tin,Matte, Diameter=2.3mm, Lead Free="Lead Free", Length=0.256inch, Mount="Through Hole,Axial", Number of Terminations=2, Packaging="Tape and Reel", Pricing 1="5000=0.00703, 10000=0.00611, 25000=0.00537, 50000=0.00492, 125000=0.00482 (USD)", Radiation Hardening=No, Stock 1=0, Supplier 1=Digi-Key
R11: Case/Package=0603, Case Code (Metric)=1608, Manufacturer=Vishay, Manufacturer Part Number=CRCW060368R0FKEA, Max Operating Temperature=155°C, Max Power Dissipation=100mW, Min Operating Temperature=-55°C, Package Quantity=10, Resistance=68, Supplier Part Number 1=541-68.0HTR-ND, Temperature Coefficient=100ppm/°C, Tolerance=1%, Voltage Rating=75V, Case Code (Imperial)=0603, ComponentLink1Description=https://datasheet.ciiva.com/2494/dcrcwe3-2494368.pdf, ComponentLink1URL=https://datasheet.ciiva.com/2494/dcrcwe3-2494368.pdf, ComponentLink2Description=https://datasheet.ciiva.com/11809/0900766b80d98afc-11809013.pdf, ComponentLink2URL=https://datasheet.ciiva.com/11809/0900766b80d98afc-11809013.pdf, ComponentLink3Description=https://datasheet.ciiva.com/8337/dcrcwe3-8337350.pdf, ComponentLink3URL=https://datasheet.ciiva.com/8337/dcrcwe3-8337350.pdf, ComponentLink4Description=https://datasheet.ciiva.com/7777/1697337-7777608.pdf, ComponentLink4URL=https://datasheet.ciiva.com/7777/1697337-7777608.pdf, ComponentLink5Description=https://datasheet.ciiva.com/16770/70201119-16770904.pdf, ComponentLink5URL=https://datasheet.ciiva.com/16770/70201119-16770904.pdf, ComponentLink6Description=https://datasheet.ciiva.com/2494/dcrcwe3-2494366.pdf, ComponentLink6URL=https://datasheet.ciiva.com/2494/dcrcwe3-2494366.pdf, ComponentLink7Description=https://datasheet.ciiva.com/22870/70201119-22870302.pdf, ComponentLink7URL=https://datasheet.ciiva.com/22870/70201119-22870302.pdf, ComponentLink8Description=https://datasheet.ciiva.com/2494/dcrcwe3-2494367.pdf, ComponentLink8URL=https://datasheet.ciiva.com/2494/dcrcwe3-2494367.pdf, ComponentLink9Description=https://datasheet.ciiva.com/16200/dcrcw-16200591.pdf, ComponentLink9URL=https://datasheet.ciiva.com/16200/dcrcw-16200591.pdf, Composition="Thick Film", Contact Plating=Tin, Depth=0.85mm, Height=0.45mm, Lead Free="Lead Free", Length=1.55mm, Military Standard=Not, Number of Terminations=2, Packaging="Tape and Reel", Power Rating=100mW, Pricing 1="5000=0.00497, 10000=0.00432, 25000=0.00405 (USD)", Radiation Hardening=No, REACH SVHC=Unknown, Stock 1=0, Supplier 1=Digi-Key, Termination=SMD/SMT, Voltage Rating (DC)=75V, Weight=7.1E-05oz, Width=0.033inch
R13 R14 R15 R16 R24 R25: Case/Package=0603, Case Code (Metric)=1608, Manufacturer=Vishay, Manufacturer Part Number=CRCW060322R0FKEA, Max Operating Temperature=155°C, Min Operating Temperature=-55°C, Package Quantity=5000, Power Rating=100mW, Resistance=22R, Supplier Part Number 1=541-22.0HTR-ND, Temperature Coefficient=100ppm/°C, Tolerance=1%, Voltage Rating=75V, Case Code (Imperial)=0603, ComponentLink1Description=https://datasheet.ciiva.com/16382/dcrcwe3-16382261.pdf, ComponentLink1URL=https://datasheet.ciiva.com/16382/dcrcwe3-16382261.pdf, ComponentLink2Description=https://datasheet.ciiva.com/5552/dcrcwe3-109170-5552120.pdf, ComponentLink2URL=https://datasheet.ciiva.com/5552/dcrcwe3-109170-5552120.pdf, ComponentLink3Description=https://datasheet.ciiva.com/22700/1697337-22700361.pdf, ComponentLink3URL=https://datasheet.ciiva.com/22700/1697337-22700361.pdf, ComponentLink4Description=https://datasheet.ciiva.com/11809/0900766b80d98afc-11809067.pdf, ComponentLink4URL=https://datasheet.ciiva.com/11809/0900766b80d98afc-11809067.pdf, ComponentLink5Description=https://datasheet.ciiva.com/7672/1697337-7672876.pdf, ComponentLink5URL=https://datasheet.ciiva.com/7672/1697337-7672876.pdf, ComponentLink6Description=https://datasheet.ciiva.com/15159/getdatasheetpartid-33090-15159388.pdf, ComponentLink6URL=https://datasheet.ciiva.com/15159/getdatasheetpartid-33090-15159388.pdf, ComponentLink7Description=https://datasheet.ciiva.com/7672/1697337-7672877.pdf, ComponentLink7URL=https://datasheet.ciiva.com/7672/1697337-7672877.pdf, ComponentLink8Description=https://datasheet.ciiva.com/26316/fld-crcw-e3-data-en-26316590.pdf, ComponentLink8URL=https://datasheet.ciiva.com/26316/fld-crcw-e3-data-en-26316590.pdf, ComponentLink9Description=https://datasheet.ciiva.com/16893/dcrcw-16893903.pdf, ComponentLink9URL=https://datasheet.ciiva.com/16893/dcrcw-16893903.pdf, Composition="Thick Film", Contact Plating=Tin,Lead, Depth=0.85mm, Height=0.45mm, Lead Free="Lead Free", Length=1.55mm, Military Standard=Not, Mount="Surface Mount", Packaging="Tape and Reel", Pricing 1="5000=0.00497, 10000=0.00432, 25000=0.00405 (USD)", Radiation Hardening=No, REACH SVHC=Unknown, Stock 1=0, Supplier 1=Digi-Key, Termination=SMD/SMT, Voltage Rating (DC)=75V, Weight=7.1E-05oz, Width=0.85mm
R22: Case/Package=0603, Case Code (Metric)=1608, Manufacturer=Vishay, Manufacturer Part Number=CRCW060310R0FKEA, Max Operating Temperature=155°C, Max Power Dissipation=100mW, Min Operating Temperature=-55°C, Package Quantity=10, Supplier Part Number 1=541-10.0HTR-ND, Temperature Coefficient=100ppm/°C, Tolerance=1%, Voltage Rating=75V, Case Code (Imperial)=0603, ComponentLink1Description=https://datasheet.ciiva.com/2465/dcrcwe3-2465699.pdf, ComponentLink1URL=https://datasheet.ciiva.com/2465/dcrcwe3-2465699.pdf, ComponentLink2Description=https://datasheet.ciiva.com/2465/dcrcwe3-2465700.pdf, ComponentLink2URL=https://datasheet.ciiva.com/2465/dcrcwe3-2465700.pdf, ComponentLink3Description=https://datasheet.ciiva.com/11808/0900766b80d98afc-11808660.pdf, ComponentLink3URL=https://datasheet.ciiva.com/11808/0900766b80d98afc-11808660.pdf, ComponentLink4Description=https://datasheet.ciiva.com/2465/dcrcwe3-2465701.pdf, ComponentLink4URL=https://datasheet.ciiva.com/2465/dcrcwe3-2465701.pdf, ComponentLink5Description=https://datasheet.ciiva.com/16740/dcrcwe3-16740661.pdf, ComponentLink5URL=https://datasheet.ciiva.com/16740/dcrcwe3-16740661.pdf, ComponentLink6Description=https://datasheet.ciiva.com/26316/fld-crcw-e3-data-en-26316582.pdf, ComponentLink6URL=https://datasheet.ciiva.com/26316/fld-crcw-e3-data-en-26316582.pdf, ComponentLink7Description=https://datasheet.ciiva.com/16781/70201119-16781847.pdf, ComponentLink7URL=https://datasheet.ciiva.com/16781/70201119-16781847.pdf, ComponentLink8Description=https://datasheet.ciiva.com/3256/dcrcwe3-3256955.pdf, ComponentLink8URL=https://datasheet.ciiva.com/3256/dcrcwe3-3256955.pdf, ComponentLink9Description=https://datasheet.ciiva.com/5547/dcrcwe3-109170-5547342.pdf, ComponentLink9URL=https://datasheet.ciiva.com/5547/dcrcwe3-109170-5547342.pdf, ComponentLink10Description=https://datasheet.ciiva.com/22673/1697337-22673071.pdf, ComponentLink10URL=https://datasheet.ciiva.com/22673/1697337-22673071.pdf, Composition="Thick Film", Contact Plating=Tin, Depth=0.85mm, Height=0.45mm, Lead Free="Lead Free", Length=1.55mm, Military Standard=Not, Mount="Surface Mount", Number of Pins=2, Number of Terminations=2, Packaging="Tape and Reel", Power Rating=100mW, Pricing 1="5000=0.00497, 10000=0.00432, 25000=0.00405 (USD)", REACH SVHC=Unknown, Resistance=10, Stock 1=0, Supplier 1=Digi-Key, Termination=SMD/SMT, Voltage Rating (DC)=75V, Weight=7.1E-05oz, Width=0.033inch
R29: Case/Package=0603, Case Code (Metric)=1608, Manufacturer="Vishay Dale", Manufacturer Part Number=M55342E12B40B2RWS, Max Operating Temperature=150°C, Max Power Dissipation=100mW, Min Operating Temperature=-55°C, Package Quantity=1, Resistance=40.2k, Supplier Part Number 1=M55342E12B40B2RWS-MIL, Temperature Coefficient=25ppm/°C, Tolerance=0.1%, Case Code (Imperial)=0603, ComponentLink1Description=https://datasheet.ciiva.com/16884/crcwhpe3-16884389.pdf, ComponentLink1URL=https://datasheet.ciiva.com/16884/crcwhpe3-16884389.pdf, ComponentLink2Description=https://datasheet.ciiva.com/9010/crcwhpe3-9010219.pdf, ComponentLink2URL=https://datasheet.ciiva.com/9010/crcwhpe3-9010219.pdf, ComponentLink3Description=https://datasheet.ciiva.com/2527/crcwhpe3-2527276.pdf, ComponentLink3URL=https://datasheet.ciiva.com/2527/crcwhpe3-2527276.pdf, ComponentLink4Description=https://datasheet.ciiva.com/2527/crcwhpe3-2527277.pdf, ComponentLink4URL=https://datasheet.ciiva.com/2527/crcwhpe3-2527277.pdf, ComponentLink5Description=https://datasheet.ciiva.com/2527/crcwhpe3-2527278.pdf, ComponentLink5URL=https://datasheet.ciiva.com/2527/crcwhpe3-2527278.pdf, ComponentLink6Description=http://www.vishay.com/docs/60018/eh.pdf, ComponentLink6URL=http://www.vishay.com/docs/60018/eh.pdf, Composition="Thin Film", Failure Rate=0.01%, Height=0.033inch, Length=0.064inch, Number of Terminations=2, Packaging=Tray, Stock 1=0, Supplier 1=Digi-Key, Width=0.032inch
R30: Case/Package=0603, Case Code (Metric)=1608, Manufacturer="TE Connectivity", Manufacturer Part Number=8-2176089-5, Max Operating Temperature=155°C, Max Power Dissipation=167mW, Min Operating Temperature=-55°C, Package Quantity=1, Resistance=88.7k, Supplier Part Number 1=A110295TR-ND, Temperature Coefficient=25ppm/°C, Tolerance=0.1%, Case Code (Imperial)=0603, ComponentLink1Description=https://datasheet.ciiva.com/41810/eng-ds-1773272-j-41810143.pdf, ComponentLink1URL=https://datasheet.ciiva.com/41810/eng-ds-1773272-j-41810143.pdf, ComponentLink2Description=https://datasheet.ciiva.com/41821/eng-ds-1773272-j-41821583.pdf, ComponentLink2URL=https://datasheet.ciiva.com/41821/eng-ds-1773272-j-41821583.pdf, Composition="Thin Film", Height=0.022inch, Length=0.061inch, Number of Terminations=2, Packaging="Tape and Reel", Pricing 1="1000=0.14518, 2000=0.1432 (USD)", Stock 1=0, Supplier 1=Digi-Key, Width=0.031inch
R32: Case/Package=0603, Case Code (Metric)=1608, Manufacturer="TE Connectivity", Manufacturer Part Number=3-2176089-1, Max Operating Temperature=155°C, Max Power Dissipation=167mW, Min Operating Temperature=-55°C, Package Quantity=1000, Power Rating=166mW, Resistance=23.2kR, Supplier Part Number 1=A110239TR-ND, Temperature Coefficient=25ppm/°C, Tolerance=0.1%, Voltage Rating=100V, Case Code (Imperial)=0603, ComponentLink1Description=https://datasheet.ciiva.com/41825/eng-ds-1773272-j-41825125.pdf, ComponentLink1URL=https://datasheet.ciiva.com/41825/eng-ds-1773272-j-41825125.pdf, ComponentLink2Description=https://datasheet.ciiva.com/41807/eng-ds-1773272-j-41807015.pdf, ComponentLink2URL=https://datasheet.ciiva.com/41807/eng-ds-1773272-j-41807015.pdf, ComponentLink3Description=https://datasheet.ciiva.com/41818/eng-ds-1773272-j-41818073.pdf, ComponentLink3URL=https://datasheet.ciiva.com/41818/eng-ds-1773272-j-41818073.pdf, Composition="Thin Film", Height=0.022inch, Length=0.061inch, Mount="Surface Mount", Number of Terminations=2, Packaging="Cut Tape", Pricing 1="1000=0.14518, 2000=0.1432 (USD)", REACH SVHC="No SVHC", Stock 1=1000, Supplier 1=Digi-Key, Voltage Rating (DC)=100V, Width=0.031inch
R33: Case/Package=0603, Case Code (Metric)=1608, Manufacturer="TE Connectivity", Manufacturer Part Number=2176090-2, Max Operating Temperature=155°C, Max Power Dissipation=167mW, Min Operating Temperature=-55°C, Package Quantity=1000, Resistance=133kR, Supplier Part Number 1=A110312TR-ND, Temperature Coefficient=25ppm/°C, Tolerance=0.1%, Case Code (Imperial)=0603, ComponentLink1Description=https://datasheet.ciiva.com/41823/eng-ds-1773272-j-41823608.pdf, ComponentLink1URL=https://datasheet.ciiva.com/41823/eng-ds-1773272-j-41823608.pdf, ComponentLink2Description=https://datasheet.ciiva.com/41810/eng-ds-1773272-j-41810377.pdf, ComponentLink2URL=https://datasheet.ciiva.com/41810/eng-ds-1773272-j-41810377.pdf, ComponentLink3Description=https://datasheet.ciiva.com/41824/eng-ds-1773272-j-41824430.pdf, ComponentLink3URL=https://datasheet.ciiva.com/41824/eng-ds-1773272-j-41824430.pdf, Composition="Thin Film", Depth=0.8mm, Height=0.022inch, Length=0.061inch, Military Standard=Not, Number of Terminations=2, Packaging="Tape and Reel", Pricing 1="1000=0.14518, 2000=0.1432 (USD)", Stock 1=0, Supplier 1=Digi-Key, Width=0.031inch
R39: Case/Package=0603, Case Code (Metric)=1608, Manufacturer=Panasonic, Manufacturer Part Number=ERJ-3EKF1502V, Max Operating Temperature=155°C, Max Power Dissipation=100mW, Min Operating Temperature=-55°C, Package Quantity=1, Resistance=15k, Supplier Part Number 1=P15.0KHTR-ND, Temperature Coefficient=100ppm/°C, Tolerance=1%, Voltage Rating=75V, Case Code (Imperial)=0603, ComponentLink1Description=https://datasheet.ciiva.com/16770/70260748-16770997.pdf, ComponentLink1URL=https://datasheet.ciiva.com/16770/70260748-16770997.pdf, ComponentLink2Description=https://datasheet.ciiva.com/7830/426256-7830982.pdf, ComponentLink2URL=https://datasheet.ciiva.com/7830/426256-7830982.pdf, ComponentLink3Description=https://datasheet.ciiva.com/24026/aoa0000ce2-24026054.pdf, ComponentLink3URL=https://datasheet.ciiva.com/24026/aoa0000ce2-24026054.pdf, ComponentLink4Description=https://datasheet.ciiva.com/6138/aoa0000ce2-6138183.pdf, ComponentLink4URL=https://datasheet.ciiva.com/6138/aoa0000ce2-6138183.pdf, ComponentLink5Description=https://datasheet.ciiva.com/48530/aoa0000ce2-48530983.pdf, ComponentLink5URL=https://datasheet.ciiva.com/48530/aoa0000ce2-48530983.pdf, ComponentLink6Description=https://datasheet.ciiva.com/9193/aoa0000ce2-9193001.pdf, ComponentLink6URL=https://datasheet.ciiva.com/9193/aoa0000ce2-9193001.pdf, ComponentLink7Description=https://datasheet.ciiva.com/16762/70260748-16762729.pdf, ComponentLink7URL=https://datasheet.ciiva.com/16762/70260748-16762729.pdf, ComponentLink8Description=https://datasheet.ciiva.com/22722/426256-22722779.pdf, ComponentLink8URL=https://datasheet.ciiva.com/22722/426256-22722779.pdf, ComponentLink9Description=https://datasheet.ciiva.com/7830/aoa0000ce2-7830732.pdf, ComponentLink9URL=https://datasheet.ciiva.com/7830/aoa0000ce2-7830732.pdf, ComponentLink10Description=https://datasheet.ciiva.com/46372/1678782-46372846.pdf, ComponentLink10URL=https://datasheet.ciiva.com/46372/1678782-46372846.pdf, ComponentLink11Description=https://datasheet.ciiva.com/46372/1678782-46372847.pdf, ComponentLink11URL=https://datasheet.ciiva.com/46372/1678782-46372847.pdf, Composition="Thick Film", Contact Plating=Tin, Depth=0.8mm, Height=0.022inch, Lead Free="Lead Free", Length=1.6mm, Military Standard=Not, Mount="Surface Mount", Number of Pins=2, Number of Terminations=2, Packaging="Tape and Reel", Power Rating=100mW, Pricing 1="5000=0.00751, 10000=0.00653, 25000=0.00573, 50000=0.00526, 125000=0.00515 (USD)", Radiation Hardening=No, REACH SVHC="No SVHC", Stock 1=0, Supplier 1=Digi-Key, Termination=SMD/SMT, Voltage Rating (DC)=75V, Width=0.031inch
RFIO1: "RF Connector SMA Straight PCB Jack Surface Mount 50 Ohm", Part No=132134-15
SW1: Case/Package=SMD/SMT, Contact Current Rating=50mA, Contact Resistance=100mR, IP Rating="IP67,Waterproof,Dust Tight", Manufacturer=Omron, Max Operating Temperature=70°C, Max Voltage Rating (DC)=24V, Min Operating Temperature=-25°C, Operating Force=1.57N, Package Quantity=1, Supplier Part Number 1=SW261TR-ND, ComponentLink1Description=https://datasheet.ciiva.com/1532/en-b3sn-1532676.pdf, ComponentLink1URL=https://datasheet.ciiva.com/1532/en-b3sn-1532676.pdf, ComponentLink2Description=https://datasheet.ciiva.com/16154/en-b3sn-16154998.pdf, ComponentLink2URL=https://datasheet.ciiva.com/16154/en-b3sn-16154998.pdf, ComponentLink3Description=https://datasheet.ciiva.com/2900/b3sn-1110-2900023.pdf, ComponentLink3URL=https://datasheet.ciiva.com/2900/b3sn-1110-2900023.pdf, ComponentLink4Description=https://datasheet.ciiva.com/5283/en-b3sn-371257-5283623.pdf, ComponentLink4URL=https://datasheet.ciiva.com/5283/en-b3sn-371257-5283623.pdf, ComponentLink5Description=https://datasheet.ciiva.com/2900/b3sn-1110-2900024.pdf, ComponentLink5URL=https://datasheet.ciiva.com/2900/b3sn-1110-2900024.pdf, ComponentLink6Description=https://datasheet.ciiva.com/2900/b3sn-1110-2900025.pdf, ComponentLink6URL=https://datasheet.ciiva.com/2900/b3sn-1110-2900025.pdf, ComponentLink7Description=https://datasheet.ciiva.com/15183/getdatasheetpartid-87284-15183738.pdf, ComponentLink7URL=https://datasheet.ciiva.com/15183/getdatasheetpartid-87284-15183738.pdf, ComponentLink8Description=https://datasheet.ciiva.com/30076/en-b3sn-30076973.pdf, ComponentLink8URL=https://datasheet.ciiva.com/30076/en-b3sn-30076973.pdf, Contact Material=Gold, Contact Plating=Gold, Current Rating=50mA, Depth=7mm, Electrical Life=50000Cycles, Height=3.1mm, Illumination Type=Non-Illuminated,Illuminated, Lead Free="Contains Lead", Length=6.5mm, Manufacturer Part Number=B3SN-3012P, Max Current Rating=50mA, Mechanical Life=100000Cycles, Mount="Surface Mount", Number of Poles=1, Orientation=Straight, Packaging="Tape and Reel", Pricing 1="3000=0.52365 (USD)", Radiation Hardening=No, REACH SVHC=Unknown, Stock 1=48000, Supplier 1=Digi-Key, Switch Function=Off-Mom, Switch Travel=0.25mm, Termination=SMD/SMT, Throw Configuration=SPST, Voltage Rating (DC)=24V, Weight=0.007055oz
SW2: Current Rating=100mA, Manufacturer=CTS, Manufacturer Part Number=219-2MSTR, Max Operating Temperature=85°C, Max Voltage Rating (DC)=20V, Min Operating Temperature=-55°C, Package Quantity=1000, Supplier Part Number 1=CT3114TR-ND, ComponentLink1Description=https://datasheet.ciiva.com/15210/getdatasheetpartid-92384-15210150.pdf, ComponentLink1URL=https://datasheet.ciiva.com/15210/getdatasheetpartid-92384-15210150.pdf, ComponentLink2Description=https://datasheet.ciiva.com/8679/219-8679450.pdf, ComponentLink2URL=https://datasheet.ciiva.com/8679/219-8679450.pdf, ComponentLink3Description=https://datasheet.ciiva.com/16316/219-16316219.pdf, ComponentLink3URL=https://datasheet.ciiva.com/16316/219-16316219.pdf, Contact Material=Copper, Contact Plating=Tin,Gold, Depth=9.91mm, Electrical Life=2000Cycles, Lead Free="Lead Free", Length=0.258inch, Max Current Rating=100mA, Mechanical Life=2000Cycles, Mount="Surface Mount", Number of Positions=2, Orientation=Straight, Packaging="Tape and Reel", Pitch=0.1inch, Pricing 1="1000=0.441, 5000=0.3591 (USD)", Radiation Hardening=No, Stock 1=16000, Supplier 1=Digi-Key, Terminal Pitch=2.54mm, Termination="Gull Wing", Throw Configuration=SPST, Voltage Rating (DC)=20V, Washable=Yes
U1: "SX1211I084"